# Altium PCB QY-PLC-20200726.PcbDoc (part 4 of 5)
Units mm, origin at the board's own origin, x right, y up, seen from the top; angles counter-clockwise.
Board outline 190.88 x 117.47 mm, 2 copper layers (Top Layer, Bottom Layer); 405 components, 307 nets, 1341 pads, 251 vias.
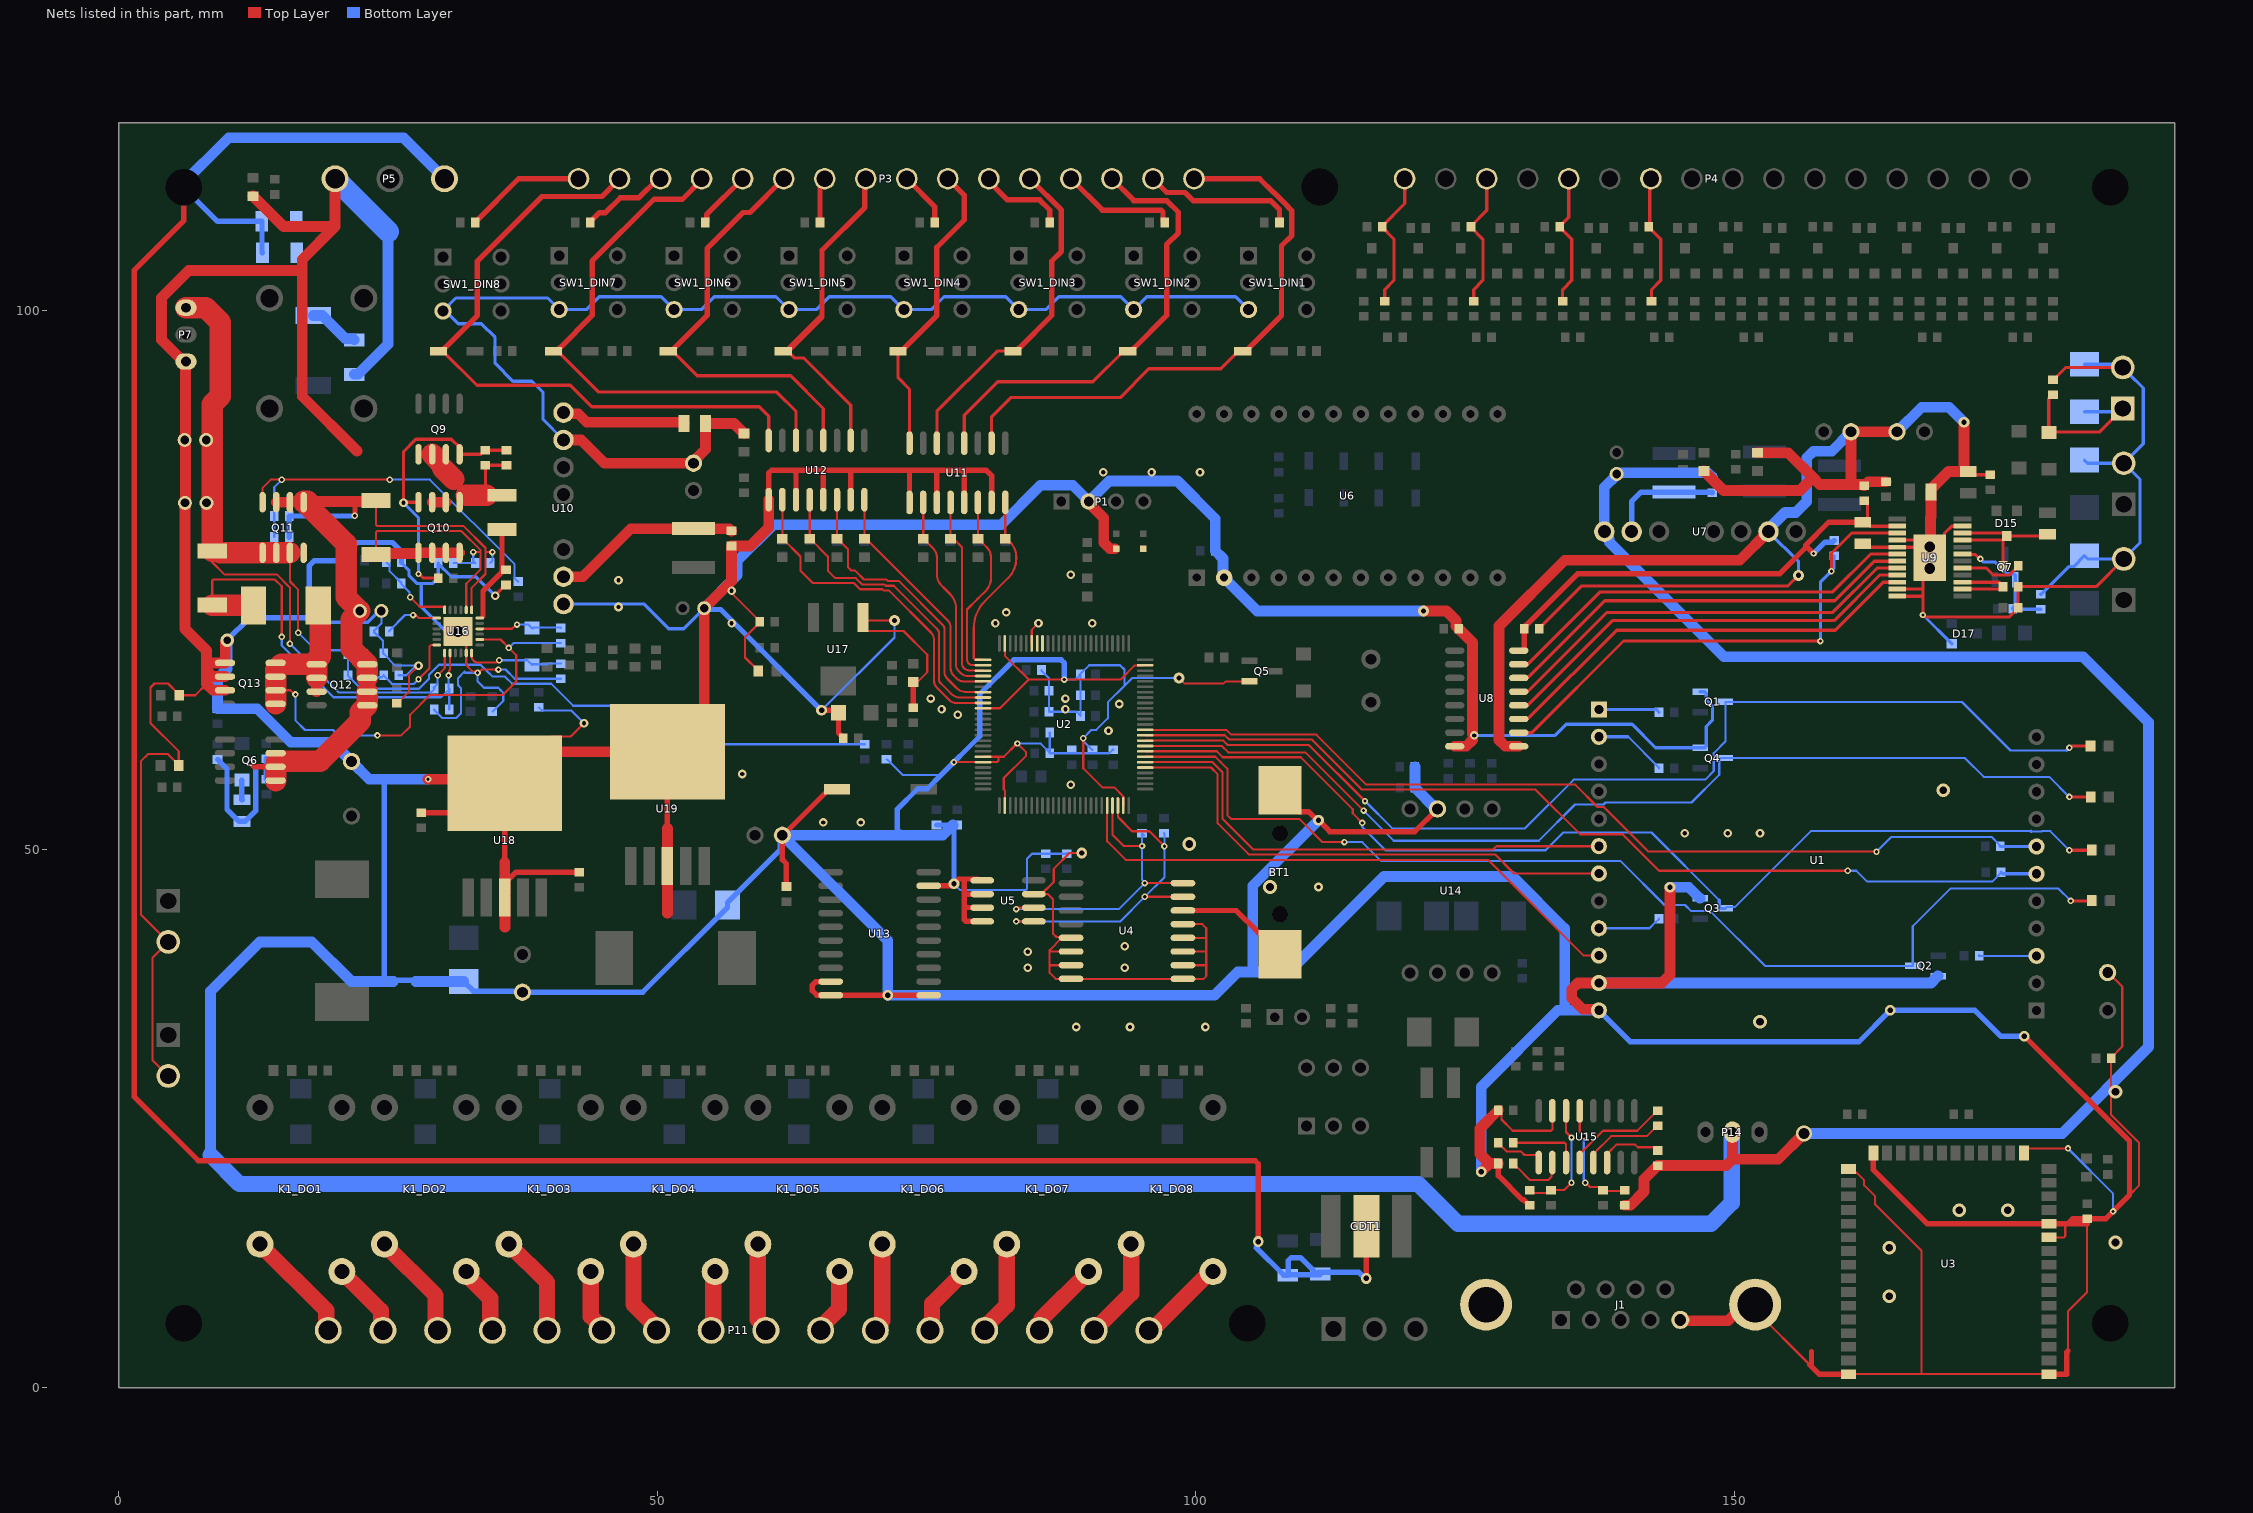
[diagram p3: the nets of this part, all layers, seen from the top]

## Via types
v1: diameter 0.6, hole 0.3, Top Layer to Bottom Layer, 163 vias
v2: diameter 0.8, hole 0.4, Top Layer to Bottom Layer, 40 vias
v3: diameter 1, hole 0.5, Top Layer to Bottom Layer, 30 vias
v4: diameter 1.27, hole 0.711, Top Layer to Bottom Layer, 11 vias
v5: diameter 1.5, hole 1, Top Layer to Bottom Layer, 4 vias
v6: diameter 2, hole 1.5, Top Layer to Bottom Layer, 2 vias
v7: diameter 2, hole 1, Top Layer to Bottom Layer, 1 vias

## Nets (pads, with @x,y where several pads share a name; then routed paths per layer and width w, separated by ;. In a path a pad name is that pad's centre, name@x,y a point inside that pad or via, vN(x,y) a via of type N, cw(c..) or ccw(c..) an arc to the next point about the centre after c; other vN are vias at no path point) (continued)
CH_L_C5: P4.10 R25_A5.2 R26_A5.1 | length 12.2
  Top Layer w0.3: R26_A5.1@142.051,107.873 R26_A5.1@142.051,107.823 142.051,107.773 143.157,106.667 143.157,102.833 142.302,101.978 R25_A5.2@142.302,100.903 ; R26_A5.1@142.145,107.918 142.145,112.173 P4.10@142.24,112.268
CH_L_C6: P4.12 R25_A6.2 R26_A6.1 | length 12.5
  Top Layer w0.3: R25_A6.2@134.047,100.903 134.047,101.978 134.902,102.833 134.902,106.667 133.796,107.773 R26_A6.1@133.796,107.823 133.796,107.873 134.62,108.697 P4.12@134.62,112.268
CH_L_C7: P4.14 R25_A7.2 R26_A7.1 | length 12.8
  Top Layer w0.3: R25_A7.2@125.792,100.903 125.792,101.978 126.647,102.833 126.647,106.667 125.541,107.773 R26_A7.1@125.541,107.823 125.541,107.873 127,109.332 P4.14@127,112.268
CH_L_C8: P4.16 R25_A8.2 R26_A8.1 | length 13
  Top Layer w0.3: R25_A8.2@117.537,100.903 117.537,101.978 118.392,102.833 118.392,106.667 117.286,107.773 R26_A8.1@117.286,107.823 117.286,107.873 119.38,109.967 P4.16@119.38,112.268
D1_IN: LED7.1 U2.1 U11.16 | length 17.2
  Top Layer w0.2: 79.375,70.558 79.375,67.737 79.508,67.605 80.222,67.605 U2.1@80.232,67.595 ; 79.375,70.559 cw(c82.875,70.559) 80.401,73.035 82.586,75.22 ccw(c80.838,76.971) 83.312,76.971 83.312,77.185 ccw(c81.47,77.185) 82.773,78.487 82.687,78.487 82.637,78.487 LED7.1@82.296,78.828 U11.16@82.296,82.213
D2_IN: LED9.1 U2.2 U11.14 | length 17.7
  Top Layer w0.2: LED9.1@79.756,78.828 U11.14@79.756,82.213 ; LED9.1@79.806,78.828 80.583,78.051 80.585,78.05 cw(c79.675,77.139) 80.961,77.139 80.961,75.134 cw(c79.395,75.134) 80.502,74.025 79.84,73.363 79.698,73.221 78.74,72.263 78.74,70.91 78.74,67.564 78.849,67.301 78.882,67.267 ccw(c79.316,67.762) 79.316,67.105 79.318,67.105 80.222,67.105 U2.2@80.232,67.095
D3_IN: LED11.1 U2.3 U11.12 | length 17.9
  Top Layer w0.2: U11.12@77.216,82.213 LED11.1@77.216,78.828 77.509,78.828 78.286,78.051 78.286,71.098 78.286,70.519 78.286,67.4 78.286,67.398 78.286,67.234 78.286,67.232 ccw(c78.842,67.232) 78.45,66.838 78.478,66.81 78.479,66.809 ccw(c78.945,67.275) 78.945,66.616 78.946,66.616 79.526,66.616 79.537,66.605 80.222,66.605 U2.3@80.232,66.595
D4_IN: LED13.1 U2.4 U11.10 | length 19.2
  Top Layer w0.2: U11.10@74.676,82.213 LED13.1@74.676,78.828 74.726,78.828 75.076,78.478 75.076,78.467 75.582,77.961 75.584,77.959 cw(c74.709,77.085) 75.946,77.085 75.946,77.083 75.946,75.872 75.946,75.493 75.946,75.492 ccw(c77.302,75.492) 76.343,74.533 76.344,74.532 76.612,74.264 76.613,74.263 77.162,73.714 77.164,73.712 cw(c75.81,72.359) 77.724,72.359 77.724,67.11 77.724,67.109 ccw(c78.464,67.109) 77.941,66.585 77.942,66.584 78.141,66.385 78.142,66.384 ccw(c78.839,67.081) 78.839,66.095 78.841,66.095 U2.4@80.232,66.095
D5_IN: LED8.1 U2.5 U12.16 | length 22.7
  Top Layer w0.2: U12.16@69.215,82.467 LED8.1@69.215,78.828 69.565,78.478 69.731,78.478 76.955,71.254 76.957,71.252 cw(c76.33,70.626) 77.216,70.626 77.216,66.856 77.216,66.855 ccw(c78.263,66.855) 77.523,66.114 77.524,66.113 77.76,65.877 77.761,65.876 ccw(c78.439,66.554) 78.439,65.595 78.441,65.595 U2.5@80.232,65.595
D6_IN: LED10.1 U2.7 U12.14 | length 26.6
  Top Layer w0.2: U12.14@66.675,82.467 LED10.1@66.675,78.828 66.725,78.828 67.691,77.862 67.691,76.2 68.01,75.881 68.355,75.881 69.179,75.057 71.247,75.057 71.374,74.93 72.39,74.93 76.488,70.832 76.49,70.83 cw(c76.093,70.434) 76.654,70.434 76.654,66.478 76.654,66.477 ccw(c77.579,66.477) 76.925,65.823 76.926,65.822 77.76,64.988 77.761,64.987 ccw(c78.707,65.933) 78.707,64.595 78.709,64.595 U2.7@80.232,64.595
D7_IN: LED12.1 U2.8 U12.12 | length 29.3
  Top Layer w0.2: U12.12@64.135,82.467 LED12.1@64.135,78.828 64.185,78.828 65.821,77.192 65.821,75.875 66.512,75.184 68.41,75.184 68.991,74.603 71.059,74.603 71.186,74.476 71.955,74.476 75.945,70.486 75.946,70.485 cw(c75.463,70.002) 76.146,70.002 76.146,65.791 76.146,65.789 ccw(c76.671,65.789) 76.301,65.417 77.265,64.453 77.266,64.452 ccw(c78.127,65.313) 78.127,64.095 78.129,64.095 U2.8@80.232,64.095
D8_IN: LED14.1 U2.9 U12.10 | length 31.9
  Top Layer w0.2: U12.10@61.595,82.467 LED14.1@61.595,78.828 61.645,78.828 63.281,77.192 63.281,75.875 64.426,74.73 68.222,74.73 68.803,74.149 70.871,74.149 70.998,74.022 71.513,74.022 75.353,70.182 75.355,70.18 cw(c74.539,69.366) 75.692,69.366 75.692,65.635 75.692,65.634 ccw(c76.551,65.634) 75.944,65.026 75.945,65.025 76.835,64.135 77.155,63.815 77.156,63.814 ccw(c77.684,64.341) 77.684,63.595 77.685,63.595 78.647,63.595 78.648,63.595 U2.9@80.232,63.595
DAC_4.5V: C32.2 C38.1 C39.1 R13.1 U8.16 U9.2 | length 47.2
  Top Layer w0.3: C38.1@161.925,80.375 162.19,80.375 162.352,80.537 162.352,82.108 162.102,82.358 C39.1@162.052,82.358 ; C38.1@162.2,80.375 162.565,80.01 U9.2@165.125,80.01
  Top Layer w0.5: U8.16@129.972,68.453 130.445,68.453 130.491,68.499 C32.2@130.491,70.485 130.641,70.635 130.641,70.798 135.43,75.586 154.199,75.586 156.718,78.105 ; v1(157.353,77.47) 156.603,78.22 158.758,80.375 C38.1@161.925,80.375
  Bottom Layer w0.5: v1(157.353,77.47) 158.411,78.528 159.108,78.528 R13.1@159.258,78.678
DAC_CLEAR: U8.15 U9.6 | length 39.4
  Top Layer w0.3: U8.15@129.972,67.183 130.029,67.24 130.867,67.24 137.534,73.907 159.124,73.907 162.636,77.419 U9.6@165.125,77.419
DAC_FAULT: R13.2 U8.10 U9.3 | length 48.6
  Top Layer w0.3: U8.10@129.972,60.833 131.191,60.833 139.7,69.342 v1(157.988,69.342) ; v1(159.004,75.819) 159.004,77.47 160.909,79.375 U9.3@165.125,79.375
  Bottom Layer w0.3: v1(157.988,69.342) 157.988,74.803 v1(159.004,75.819) 159.004,75.9 159.258,76.154 R13.2@159.258,77.278
DAC_LATCH: U8.14 U9.7 | length 39.6
  Top Layer w0.3: U8.14@129.972,65.913 130.029,65.97 130.867,65.97 137.978,73.081 159.314,73.081 162.992,76.759 U9.7@165.125,76.759
DAC_SCLK: U8.13 U9.8 | length 39.9
  Top Layer w0.3: U8.13@129.972,64.643 130.029,64.7 130.867,64.7 138.169,72.002 159.124,72.002 163.246,76.124 U9.8@165.125,76.124
DAC_SDIN: U8.12 U9.9 | length 40.2
  Top Layer w0.3: U8.12@129.972,63.373 130.029,63.43 130.867,63.43 138.677,71.24 159.251,71.24 163.474,75.463 U9.9@165.125,75.463
DAC_SDO: U8.11 U9.10 | length 40.4
  Top Layer w0.3: U8.11@129.972,62.103 130.029,62.16 130.867,62.16 139.058,70.351 159.378,70.351 163.824,74.797 165.119,74.797 U9.10@165.125,74.803
DI_N1: D20_DIN1.1 P3.1 U11.2 | length 53.1
  Top Layer w0.3: U11.2@81.026,87.713 81.026,90.17 82.804,91.948 92.964,91.948 95.631,94.615 102.294,94.615 103.945,96.266 D20_DIN1.1@104.345,96.266
  Top Layer w0.5: P3.1@99.822,112.268 105.918,112.268 107.196,110.99 107.246,110.99 108.515,109.721 108.515,109.671 108.902,109.284 108.902,106.998 107.95,106.045 107.95,99.568 D20_DIN1.1@104.895,96.513
DI_N2: D20_DIN2.1 P3.3 U11.4 | length 42.1
  Top Layer w0.3: U11.4@78.486,87.713 78.486,90.297 81.597,93.408 90.419,93.408 93.277,96.266 D20_DIN2.1@93.677,96.266
  Top Layer w0.5: P3.3@92.202,112.268 94.234,110.236 97.282,110.236 98.361,109.156 98.361,107.229 97.282,106.149 97.282,99.568 D20_DIN2.1@94.227,96.513
DI_N3: D20_DIN3.1 P3.5 U11.6 | length 30.9
  Top Layer w0.3: U11.6@75.946,87.713 75.946,90.678 81.534,96.266 D20_DIN3.1@83.009,96.266
  Top Layer w0.5: D20_DIN3.1@83.559,96.513 86.614,99.568 86.614,104.625 87.503,105.514 87.503,109.347 P3.5@84.582,112.268
DI_N4: D20_DIN4.1 P3.7 U11.8 | length 27.7
  Top Layer w0.3: D20_DIN4.1@72.341,96.266 72.341,93.775 73.406,92.71 U11.8@73.406,87.713
  Top Layer w0.5: D20_DIN4.1@72.891,96.513 75.946,99.568 75.946,105.907 78.497,108.458 78.497,110.733 P3.7@76.962,112.268
DI_N5: D20_DIN5.1 P3.9 U12.2 | length 34.7
  Top Layer w0.3: D20_DIN5.1@62.199,96.14 62.708,95.631 63.558,95.631 67.945,91.244 U12.2@67.945,87.967
  Top Layer w0.5: D20_DIN5.1@61.673,96.266 61.823,96.416 62.253,96.416 65.278,99.441 ; D20_DIN5.1@62.223,96.513 65.278,99.568 65.278,105.629 69.25,109.601 69.25,112.176 P3.9@69.342,112.268
DI_N6: D20_DIN6.1 P3.11 U12.4 | length 39.9
  Top Layer w0.3: D20_DIN6.1@51.005,96.266 51.405,96.266 53.691,93.98 62.357,93.98 65.405,90.932 U12.4@65.405,87.967
  Top Layer w0.5: D20_DIN6.1@51.555,96.513 54.61,99.568 54.61,105.791 57.947,109.128 58.582,109.128 P3.11@61.722,112.268
DI_N7: D20_DIN7.1 P3.13 U12.6 | length 50.3
  Top Layer w0.3: D20_DIN7.1@40.337,96.266 40.737,96.266 44.547,92.456 61.087,92.456 62.865,90.678 U12.6@62.865,87.967
  Top Layer w0.5: D20_DIN7.1@40.887,96.513 43.942,99.568 43.942,104.625 49.68,110.363 52.324,110.363 54.102,112.141 P3.13@54.102,112.268
DI_N8: D20_DIN8.1 P3.15 U12.8 | length 61.5
  Top Layer w0.3: D20_DIN8.1@29.669,96.266 30.069,96.266 33.244,93.091 41.91,93.091 43.914,91.087 59.436,91.087 60.325,90.198 U12.8@60.325,87.967
  Top Layer w0.5: D20_DIN8.1@30.069,96.266 30.219,96.416 30.219,96.513 33.274,99.568 33.274,104.625 39.266,110.617 44.831,110.617 P3.15@46.482,112.268
DI_P1: P3.2 R51_DIN1.2 | length 14.2
  Top Layer w0.5: P3.2@96.012,112.268 97.29,110.99 98.973,110.99 99.727,110.236 106.934,110.236 107.761,109.409 R51_DIN1.2@107.761,108.204 R51_DIN1.2@107.761,108.254
DI_P2: P3.4 R51_DIN2.2 | length 10.7
  Top Layer w0.5: P3.4@88.392,112.268 91.313,109.347 96.774,109.347 96.943,109.178 R51_DIN2.2@96.943,108.354 ; R51_DIN2.2@97.093,108.204 R51_DIN2.2@97.093,108.254
DI_P3: P3.6 R51_DIN3.2 | length 8.2
  Top Layer w0.5: P3.6@80.772,112.268 80.772,112.014 82.486,110.299 85.484,110.299 86.425,109.359 R51_DIN3.2@86.425,108.204 R51_DIN3.2@86.425,108.254
DI_P4: P3.8 R51_DIN4.2 | length 5.2
  Top Layer w0.5: P3.8@73.152,112.268 75.757,109.663 R51_DIN4.2@75.757,108.204 R51_DIN4.2@75.757,108.254
DI_P5: P3.10 R51_DIN5.2 | length 4.3
  Top Layer w0.5: R51_DIN5.2@65.089,108.254 R51_DIN5.2@65.089,108.204 65.089,111.419 65.565,111.895 P3.10@65.565,112.235
DI_P6: P3.12 R51_DIN6.2 | length 5.6
  Top Layer w0.5: R51_DIN6.2@54.421,108.254 R51_DIN6.2@54.421,108.204 54.571,108.354 54.571,108.927 P3.12@57.912,112.268
DI_P7: P3.14 R51_DIN7.2 | length 8.3
  Top Layer w0.5: R51_DIN7.2@43.753,108.204 43.753,108.254 44.623,109.124 45.181,109.124 46.547,110.49 48.26,110.49 50.038,112.268 P3.14@50.292,112.268
DI_P8: P3.16 R51_DIN8.2 | length 11.3
  Top Layer w0.5: R51_DIN8.2@33.085,108.204 33.085,108.254 37.099,112.268 P3.16@42.672,112.268
DO_N1: K1_DO1.3 P11.2 | length 7
  Top Layer w1.5: K1_DO1.3@20.691,10.795 24.32,7.166 24.32,5.525 P11.2@24.511,5.334
DO_N2: K1_DO2.3 P11.4 | length 6.2
  Top Layer w1.5: K1_DO2.3@32.248,10.524 34.48,8.293 34.48,5.525 P11.4@34.671,5.334
DO_N3: K1_DO3.3 P11.6 | length 5.9
  Top Layer w1.5: K1_DO3.3@43.805,10.795 43.805,6.631 44.831,5.605 P11.6@44.831,5.334
DO_N4: K1_DO4.3 P11.8 | length 5.4
  Top Layer w1.5: P11.8@54.991,5.334 55.176,5.519 K1_DO4.3@55.176,10.61
DO_N5: K1_DO5.3 P11.10 | length 6.1
  Top Layer w1.5: P11.10@65.151,5.334 65.151,5.605 66.841,7.295 K1_DO5.3@66.841,10.718
DO_N6: K1_DO6.3 P11.12 | length 6.8
  Top Layer w1.5: P11.12@75.311,5.334 75.502,5.525 75.502,7.821 K1_DO6.3@78.476,10.795
DO_N7: K1_DO7.3 P11.14 | length 7.4
  Top Layer w1.5: P11.14@85.471,5.334 85.662,5.525 85.662,6.424 K1_DO7.3@90.033,10.795
DO_N8: K1_DO8.3 P11.16 | length 8
  Top Layer w1.5: P11.16@95.631,5.334 95.88,5.334 K1_DO8.3@101.341,10.795
DO_P1: K1_DO1.4 P11.1 | length 10.6
  Top Layer w1.5: K1_DO1.4@13.091,13.335 19.24,7.186 19.24,5.525 P11.1@19.431,5.334
DO_P2: K1_DO2.4 P11.3 | length 10
  Top Layer w1.5: K1_DO2.4@24.648,13.335 29.4,8.583 29.4,5.525 P11.3@29.591,5.334
DO_P3: K1_DO3.4 P11.5 | length 9.5
  Top Layer w1.5: K1_DO3.4@36.205,13.335 39.751,9.789 P11.5@39.751,5.334
DO_P4: K1_DO4.4 P11.7 | length 8.9
  Top Layer w1.5: K1_DO4.4@47.762,13.335 47.762,7.753 49.911,5.605 P11.7@49.911,5.334
DO_P5: K1_DO5.4 P11.9 | length 8.3
  Top Layer w1.5: K1_DO5.4@59.319,13.335 59.319,6.356 60.071,5.605 P11.9@60.071,5.334
DO_P6: K1_DO6.4 P11.11 | length 8.3
  Top Layer w1.5: P11.11@70.231,5.334 70.231,5.605 70.876,6.25 K1_DO6.4@70.876,13.335
DO_P7: K1_DO7.4 P11.13 | length 8.8
  Top Layer w1.5: P11.13@80.391,5.334 80.391,5.605 82.433,7.647 K1_DO7.4@82.433,13.335
DO_P8: K1_DO8.4 P11.15 | length 9.4
  Top Layer w1.5: P11.15@90.551,5.334 93.99,8.773 K1_DO8.4@93.99,13.335
EARTH_GND: C45.1 C52.1 GDT1.2 P5.1 pad.2 R12.2 R59.2 | length 261.9
  Top Layer w0.5: pad.2@6,111.475 6,108.362 1.428,103.79 1.428,27.02 7.366,21.082 105.498,21.082 105.791,20.789 v3(105.791,13.58) ; v3(115.824,10.16) GDT1.2@115.824,14.986
  Bottom Layer w0.5: pad.2@6,111.475 9.157,108.318 C45.1@13.259,108.318 13.285,108.293 13.285,105.435 R12.2@13.31,105.41 ; v3(105.791,13.58) 105.695,13.485 105.695,13.07 105.617,12.992 108.159,10.45 R59.2@108.509,10.45 R59.2@108.56,10.501 ; C52.1@110.951,10.738 110.951,10.833 109.691,12.093 108.853,12.093 108.56,11.8 R59.2@108.56,10.501 ; v3(115.824,10.16) 115.689,10.16 115.111,10.738 111.396,10.738 C52.1@111.557,10.577 111.494,10.514 108.573,10.514 R59.2@108.56,10.501
  Bottom Layer w1: pad.2@5.672,111.565 10.185,116.078 26.416,116.078 P5.1@30.226,112.268
EXT_DAC_VCC: C33.1 D11.1 D12.2 P6.1 | length 15.1
  Top Layer w0.3: C33.1@179.578,92.202 179.528,92.202 179.197,91.871 179.197,88.745 183.868,88.745 P6.1@186.055,90.932
  Bottom Layer w0.3: D12.2@182.499,90.637 185.76,90.637 P6.1@186.055,90.932
GND: BT1.2 C1.2 C2.1 C3.1 C4.1 C6.2 C7.2 C8.1 C9.1 C10.1 C11.1 C12.1 C13.1 C14.1 C15.1 C16.1 C17.1 C18.1 C19.1 C20.1 C24.2 C26.2 C27.1 C31.1 C43.2 C44.1 C45.2 C48.1 C49.2 C50.2 C53.1 C55.1 C57.2 C58.2 C59.1 C60.2 C64.1 C65.2 C67.2 C69.2 C70.2 C71.2 C73.2 C74.1 C76.2 C77.2 C78.1 C79.2 C80.1 C81.2 C82.2 C83.2 C84.2 C85.2 D1.1 D2.1 D27.1 D28.1 J1.5 J1.10 J1.11 LED22.1 LED23.1 LED24.1 LED25.1 LED26.1 P1.2 P5.3 P7.3 P12.2 P13.2 P14.2 Q1.E Q2.E Q3.E Q4.E Q5.E Q13.1 Q13.2 Q13.3 R12.1 R74.2 R75.2 R76.2 R84.1 R85.1 R87.2 R92.2 S1.1 U1.11 U1.12 U2.10 U2.19 U2.20 U2.27 U2.49 U2.74 U2.94 U2.99 U3.1 U3.11 U3.12 U3.17 U3.28 U3.29 U3.44 U4.5 U4.6 U4.7 U4.8 U4.9 U4.10 U4.11 U4.12 U4.13 U5.1 U5.2 U5.3 U5.4 U5.7 U6.2 U7.1 U8.8 U10.1 U11.9 U11.11 U11.13 U11.15 U12.9 U12.11 U12.13 U12.15 U13.9 U13.10 U13.11 U13.19 U14.2 U15.15 U16.17 U16.25 U17.1 U18.3 U18.6 U19.3 U19.6 | length 1755.5
  Top Layer w0.2: P13.2@4.572,28.956 3.118,30.41 3.118,39.948 P12.2@4.572,41.402 2.032,43.942 2.032,58.166 2.711,58.845 4.539,58.845 LED24.1@5.549,57.835 ; LED24.1@5.549,57.785 LED24.1@5.549,57.835 ; 8.128,65.356 7.086,64.313 LED26.1@5.588,64.313 5.588,64.363 4.546,65.405 3.302,65.405 2.921,65.024 2.921,61.722 5.549,59.094 LED24.1@5.549,57.835 ; R76.2@25.781,63.554 25.831,63.554 26.915,64.637 26.915,66.158 v2(27.813,67.056) ; v5(31.483,70.231) 32.246,69.468 U16.17@32.246,68.231 ; U16.17@32.246,67.931 32.252,67.925 32.252,67.115 32.864,66.502 33.193,66.502 33.22,66.475 33.482,66.475 33.701,66.694 35.13,66.694 35.179,66.645 v1(35.228,66.694) ; U18.6@38.735,59.055 40.159,60.479 41.937,60.479 v2(43.18,61.722) ; 56.38,74.43 56.38,74.288 59.498,71.17 C78.1@59.498,71.12 59.498,71.07 58.128,69.7 58.128,67.818 59.348,66.598 LED22.1@59.348,66.548 ; v3(72.009,71.247) 69.369,71.247 U17.1@69.088,71.528 69.088,70.678 69.488,70.278 72.851,70.278 75.057,68.072 75.057,66.456 LED23.1@73.752,65.151 ; v1(77.527,58.095) U2.20@80.232,58.095 81.544,58.095 81.661,58.212 81.661,58.595 ; U2.19@80.232,58.595 81.661,58.595 ; U2.10@80.232,63.095 81.802,63.095 84.474,65.767 ; U2.27@82.257,54.07 82.257,55.463 82.161,55.558 82.161,56.627 84.237,58.703 84.237,59.002 v1@83.43,59.809 ; U2.99@82.257,69.12 82.257,67.984 84.474,65.767 ; v1(83.43,59.826) 83.382,59.826 82.15,58.595 81.661,58.595 ; U2.94@84.757,69.12 84.757,70.376 v2(85.381,71) ; U5.7@84.95,45.847 U5.7@85.667,45.847 ; U4.5@87.556,41.783 86.413,40.64 ; U4.5@88.328,41.86 87.045,41.86 86.741,42.164 86.741,45.339 86.233,45.847 U5.7@85.667,45.847 ; U4.7@88.405,39.243 86.54,39.243 86.413,39.116 ; U4.6@88.405,40.513 86.54,40.513 86.413,40.64 ; v3(89.408,49.657) 88.265,49.657 86.792,48.184 86.792,46.971 U5.7@85.667,45.847 ; v1(89.535,60.325) 89.535,57.531 91.313,55.753 92.401,55.753 93.247,54.907 93.247,54.08 U2.49@93.257,54.07 ; U2.74@95.282,67.095 95.272,67.085 94.334,67.085 93.016,65.767 v1(87.776,65.767) 84.474,65.767 ; v3(98.425,65.913) 98.952,65.386 102.543,65.386 102.755,65.598 Q5.E@104.976,65.598 ; U4.10@98.793,39.243 100.965,39.243 ; U4.11@98.793,40.513 100.965,40.513 ; U4.12@98.793,41.783 100.965,41.783 ; U4.13@98.793,43.053 100.584,43.053 100.965,42.672 100.965,41.783 ; BT1.2@107.796,55.499 107.796,55.249 BT1.2@109.546,53.499 ; C53.1@128.078,25.781 128.378,25.481 128.378,24.911 129.413,23.876 132.979,23.876 133.096,23.993 U15.15@133.096,25.718 ; J1.11@151.929,7.724 151.929,7.202 156.972,2.159 ; U3.44@160.577,1.27 167.386,1.27 ; U3.29@160.577,20.32 160.927,19.97 161.354,19.97 162.048,19.275 162.048,18.8 163.064,17.784 163.064,17.022 167.386,12.7 167.386,1.27 ; U3.17@176.887,21.79 176.887,21.875 177.237,22.225 v1(180.975,22.225) ; U3.1@179.197,1.27 167.386,1.27 ; U3.11@179.197,13.97 180.604,13.97 180.721,14.087 180.721,15.24 ; 180.975,3.429 180.975,7.112 182.753,8.89 182.753,15.24 ; C1.2@184.658,38.552 184.724,38.552 186.012,37.264 186.012,31.692 184.977,30.657 C2.1@184.977,30.607 184.977,25.335 187.579,22.733 187.579,18.796 186.682,17.899 ; 86.413,39.116 86.413,40.64 ; 86.413,39.116 86.413,38.534 86.973,37.973 U4.8@88.405,37.973 U4.9@98.793,37.973 100.711,37.973 100.965,38.227 100.965,39.243 ; 100.965,39.243 100.965,40.513 ; 100.965,40.513 100.965,41.783
  Top Layer w0.3: v2(34.925,73.533) 34.925,73.583 35.891,74.549 C65.2@35.941,74.549 ; v2@125.73,60.706 v2(125.857,60.579)
  Top Layer w0.5: C82.2@28.067,53.405 33.085,53.405 U18.6@35.814,56.134 35.814,48.768 ; U18.3@35.814,45.534 36.099,45.819 36.099,47.114 36.866,47.882 C83.2@42.729,47.882 ; 50.927,51.943 U19.6@50.927,58.42 ; U12.9@60.325,82.467 60.325,84.924 60.618,85.217 62.611,85.217 ; C48.1@61.976,46.547 61.976,48.663 61.595,49.044 C85.2@61.595,51.308 61.67,51.308 65.943,55.581 S1.1@66.668,55.581 ; U12.11@62.865,82.467 62.865,84.963 62.611,85.217 ; v3(65.239,62.904) 66.593,62.904 C79.2@66.816,62.682 66.816,60.804 67.245,60.375 C80.1@67.245,60.325 ; U12.13@65.405,82.467 65.405,85.09 65.532,85.217 ; U13.9@66.084,37.719 66.065,37.7 64.682,37.7 64.389,37.407 64.389,36.869 64.79,36.468 66.065,36.468 U13.10@66.084,36.449 v3(71.374,36.449) U13.11@75.184,36.449 ; U12.15@67.945,82.467 67.945,85.154 67.881,85.217 ; U11.9@73.406,82.213 73.406,85.217 ; LED23.1@73.752,65.151 73.752,63.148 C4.1@73.754,63.145 ; U13.19@75.184,46.609 77.343,46.609 v3(77.533,46.799) 77.978,47.244 78.486,47.244 ; U11.11@75.946,82.213 75.946,85.217 ; U11.13@78.486,82.213 78.486,85.09 78.613,85.217 ; U5.1@79.756,47.244 78.486,47.244 ; U5.4@80.15,43.307 80.131,43.326 78.633,43.326 78.486,43.473 78.486,44.831 ; U5.3@80.15,44.577 80.131,44.596 78.721,44.596 78.486,44.831 ; U5.2@80.15,45.847 78.486,45.847 ; U11.15@81.026,82.213 81.026,84.709 80.518,85.217 78.613,85.217 ; BT1.2@109.546,53.499 110.45,53.499 111.244,52.705 v3(111.379,52.705) 112.437,51.647 120.318,51.647 U14.2@122.428,53.757 ; C55.1@128.078,20.828 128.078,19.701 130.33,17.449 130.443,17.449 130.939,16.953 C57.2@130.989,16.953 ; 156.972,2.159 157.162,1.968 ; 157.162,3.365 157.162,1.968 ; U3.44@160.577,1.27 157.861,1.27 157.162,1.968 ; U3.28@162.907,21.79 162.907,20.227 167.894,15.24 U3.12@179.197,15.24 180.721,15.24 180.953,15.24 ; v3(176.911,32.639) 176.961,32.639 186.682,22.918 186.682,17.899 v1(185.166,16.383) 184.466,15.683 C3.1@182.753,15.683 181.397,15.683 180.953,15.24 ; U3.1@179.197,1.27 180.858,1.27 180.858,3.312 180.975,3.429 ; 182.753,15.24 180.953,15.24 ; 62.611,85.217 65.532,85.217 ; 65.532,85.217 67.881,85.217 ; 67.881,85.217 73.406,85.217 ; 73.406,85.217 75.946,85.217 ; 75.946,85.217 78.613,85.217 ; 78.486,44.831 78.486,45.847 ; 78.486,45.847 78.486,47.244
  Top Layer w1: Q13.3@9.842,64.77 8.714,64.77 8.128,65.356 8.128,66.626 ; Q13.2@9.842,66.04 8.714,66.04 8.128,66.626 ; Q13.1@9.842,67.31 8.128,67.31 ; Q13.1@9.874,67.51 9.874,69.185 10.041,69.352 v4(10.041,69.425) ; LED25.1@12.446,110.656 15.279,107.823 20.066,107.823 ; P5.3@20.066,112.268 20.066,107.823 ; 22.098,86.995 17.018,92.075 17.018,103.759 ; v1(28.702,56.515) 35.433,56.515 U18.6@35.814,56.134 38.735,59.055 U19.6@50.927,59.055 54.34,62.468 C43.2@54.34,72.39 56.38,74.43 56.87,74.92 C44.1@56.87,78.167 58.609,78.167 60.325,79.883 U12.9@60.325,82.467 ; 35.814,48.768 U18.3@35.814,45.534 35.849,45.499 35.849,42.764 ; 50.927,44.069 U19.3@50.927,48.455 50.927,51.943 ; P1.2@90.043,82.296 90.043,82.161 91.44,80.764 91.44,78.499 92.026,77.913 D1.1@92.472,77.913 ; U6.2@102.616,75.224 U6.2@102.616,75.3 ; v3(121.129,72.136) 123.263,72.136 124.152,71.247 124.152,70.731 125.681,69.202 v2@125.681,60.706 ; U8.8@124.028,59.563 125.095,59.563 125.681,60.149 ; v3(126.492,20.066) 127.254,20.828 ; C55.1@128.078,20.828 127.254,20.828 ; C53.1@128.078,25.781 126.365,24.068 126.365,21.717 127.254,20.828 ; U1.12@137.414,35.052 137.318,35.148 135.921,35.148 134.891,36.178 134.891,37.006 135.477,37.592 U1.11@137.414,37.592 143.256,37.592 144.018,38.354 v3(144.018,46.482) ; C58.2@139.827,16.953 140.344,16.953 141.609,18.219 141.609,19.37 C59.1@142.875,20.636 149.234,20.636 149.82,21.222 ; J1.5@145.055,6.223 149.393,6.223 J1.11@150.894,7.724 ; P14.2@149.82,23.749 149.82,21.222 ; v5(156.464,23.622) 154.064,21.222 149.82,21.222 ; 8.128,66.626 8.128,67.31 ; 8.128,67.31 8.128,68.453 6.128,70.453 C70.2@6.128,82.169 6.175,82.216 6.175,95.243 6.02,95.243 3.937,97.326 3.937,101.219 6.477,103.759 17.018,103.759 ; 17.018,103.759 17.018,104.775 20.066,107.823
  Bottom Layer w0.2: C76.2@23.684,70.231 23.684,70.181 24.527,69.338 24.527,68.245 C73.2@24.573,68.199 24.573,68.149 25.666,67.056 v2@27.566,67.056 ; C76.2@23.684,70.281 24.368,70.965 C60.2@24.368,72.136 ; R84.1@25.977,66.167 26.677,66.167 v2@27.566,67.056 ; v2(27.813,67.056) v2@27.566,67.056 ; C74.1@29.272,62.992 29.272,62.942 30.026,62.188 31.327,62.188 31.75,62.611 31.75,64.988 31.477,65.261 31.477,65.894 32.067,66.484 32.154,66.398 v1(33.297,66.398) 33.297,65.6 33.892,65.005 35.216,65.005 35.477,64.744 35.477,64.736 35.687,64.526 35.687,63.766 34.721,62.8 R75.2@34.671,62.8 ; v1(35.228,66.694) 35.893,66.694 36.742,65.845 C71.2@41.021,65.845 ; R74.2@38.989,63.181 39.289,62.881 42.021,62.881 v2(43.18,61.722) ; v3(65.239,62.904) 72.009,69.675 v3(72.009,71.247) ; R85.1@71.266,58.355 71.316,58.355 72.775,56.896 76.321,56.896 ; v3(77.533,46.799) 78.124,46.209 84.192,46.209 84.309,46.326 84.309,49.13 84.774,49.595 C7.2@86.059,49.595 C8.1@88.011,49.595 88.073,49.657 v3(89.408,49.657) ; v1(83.43,59.826) 83.439,59.817 85.586,59.817 C6.2@86.425,58.978 ; C12.1@85.659,66.645 85.659,66.595 86.36,65.894 C14.1@86.36,64.711 C13.1@86.36,62.778 88.928,62.778 C18.1@89.278,62.427 ; C15.1@86.425,60.844 C6.2@86.425,58.978 ; v1(87.776,65.767) 88.8,65.767 88.928,65.895 88.978,65.895 89.128,66.045 89.128,66.145 90.082,67.099 92.957,67.099 93.364,66.692 93.364,65.202 ; C18.1@89.278,62.377 C18.1@89.278,62.427 ; C17.1@89.278,66.195 C20.1@89.278,64.311 C18.1@89.278,62.427 ; C16.1@90.395,59.247 90.345,59.247 89.612,59.981 89.612,60.248 v1(89.535,60.325) 90.301,61.091 90.742,61.091 91.821,62.17 91.821,63.659 93.364,65.202 ; C10.1@92.329,59.247 92.279,59.247 91.96,58.928 C6.2@86.425,58.928 C6.2@86.425,58.978 ; v3(98.425,65.913) 94.075,65.913 93.364,65.202 ; 105.283,46.355 105.283,46.609 ; v1(180.975,22.225) 185.166,18.034 v1(185.166,16.383)
  Bottom Layer w0.3: 17.653,71.628 17.78,71.501 18.199,71.082 23.114,71.082 24.168,72.136 C60.2@24.368,72.136 ; C77.2@26.233,76.656 26.233,76.606 26.924,75.915 26.924,75.458 27.706,74.676 28.067,74.676 ; C67.2@29.653,76.581 C67.2@29.653,76.531 ; v5(31.483,70.231) 30.353,70.231 28.067,72.517 28.067,74.676 ; v2(34.925,73.533) 33.147,75.311 30.873,75.311 C67.2@29.653,76.531 ; U10.1@41.275,72.771 48.768,72.771 51.054,70.485 52.435,70.485 C43.2@54.34,72.39 ; v2(125.857,60.579) 133.35,60.579 134.377,61.606 140.499,61.606 142.674,59.431 Q4.E@146.812,59.431 147.237,59.431 147.387,59.581 147.387,61.408 147.955,61.976 147.955,63.32 147.387,63.888 147.387,64.488 147.237,64.638 Q1.E@146.812,64.638 ; 28.067,74.676 29.083,74.676 29.653,75.246 C67.2@29.653,76.531
  Bottom Layer w0.5: v4(10.041,69.425) 12.117,71.501 17.78,71.501 ; 17.653,71.628 17.653,76.327 18.137,76.811 R87.2@21.398,76.811 21.398,77.786 22.098,78.486 25.4,78.486 26.233,77.653 C77.2@26.233,76.656 ; 24.384,56.515 24.638,56.261 24.638,37.726 ; 25.462,37.846 27.432,37.846 27.552,37.726 ; D27.1@32.004,37.726 32.899,36.831 37.359,36.831 C84.2@37.459,36.731 48.623,36.731 56.508,44.616 D28.1@56.508,44.831 56.508,45.046 61.385,49.923 61.385,51.098 C85.2@61.595,51.308 ; C43.2@54.34,72.39 54.462,72.268 55.875,72.268 v3(65.239,62.904) ; 72.544,51.574 72.251,51.867 72.251,53.709 74.168,55.626 75.051,55.626 76.321,56.896 79.926,60.501 79.926,64.432 83.093,67.599 87.483,67.599 87.776,67.306 v1(87.776,65.767) ; C11.1@75.917,52.259 77.451,52.259 77.651,52.059 77.533,51.942 v3(77.533,46.799) ; U1.12@137.414,35.052 140.335,32.131 161.544,32.131 v3(164.465,35.052) 172.339,35.052 174.752,32.639 v3(176.911,32.639)
  Bottom Layer w1: 8.509,21.59 8.509,36.83 13.081,41.402 17.907,41.402 21.583,37.726 24.638,37.726 25.462,37.726 ; v4(10.041,69.425) 10.041,66.742 9.144,65.845 R92.2@9.144,63.057 12.84,63.057 15.953,59.944 19.812,59.944 C81.2@21.59,58.166 23.241,56.515 24.384,56.515 v1(28.702,56.515) ; C64.1@21.844,94.107 22.194,94.107 24.988,96.901 24.988,107.346 ; 27.552,37.726 D27.1@32.004,37.726 ; C43.2@54.34,72.39 57.415,75.465 57.415,76.788 60.764,80.137 81.915,80.137 85.578,83.8 88.565,83.8 90.043,82.322 P1.2@90.043,82.296 91.948,84.201 98.298,84.201 101.792,80.707 C24.2@101.792,77.724 102.511,77.005 102.511,75.329 U6.2@102.616,75.224 105.704,72.136 v3(121.129,72.136) ; C19.1@77.451,52.259 76.5,51.308 C85.2@61.595,51.308 71.374,41.529 v3(71.374,36.449) 101.727,36.449 103.886,38.608 105.283,38.608 ; 105.283,46.355 105.283,38.608 ; 105.283,46.609 v3(111.379,52.705) ; C50.2@120.334,57.658 C49.2@120.334,55.724 122.301,53.757 U14.2@122.428,53.757 ; v3(126.492,20.066) 126.492,27.94 133.604,35.052 134.239,35.052 ; U1.12@137.414,35.052 134.239,35.052 ; U1.11@137.414,37.592 168.245,37.592 168.885,38.232 Q2.E@168.91,38.232 ; v3(144.018,46.482) 145.766,46.482 146.787,45.461 Q3.E@146.812,45.461 ; C27.1@147.955,84.52 147.512,84.963 139.388,84.963 139.335,84.909 139.122,84.909 C26.2@139.065,84.852 139.065,84.771 137.922,83.628 137.922,79.258 138.372,78.808 138.372,78.544 149.032,67.884 182.361,67.884 188.448,61.797 188.448,31.635 180.435,23.622 v5(156.464,23.622) ; P14.2@149.756,23.685 P14.2@149.82,23.749 ; 105.283,38.608 108.585,38.608 117.463,47.486 129.39,47.486 134.239,42.637 134.239,35.052
  Bottom Layer w1.5: 8.509,21.59 11.176,18.923 120.65,18.923 124.333,15.24 133.652,15.24 133.654,15.238 147.826,15.238 149.756,17.168 149.756,23.435 149.82,23.499 P14.2@149.82,23.685
  Bottom Layer w2: P5.3@20.066,112.268 24.988,107.346
  other v2: 88.881,33.5 93.881,33.5 100.881,33.5 84.381,39 93.381,39 84.381,40.5 93.381,41 111.381,46.5 145.381,51.5 149.381,51.5 152.381,51.5 65.381,52.5 68.881,52.5 88.381,56 57.881,57 91.881,61 77.881,62.5 76.381,63 87.881,63 92.881,63.5 75.381,64 87.881,64 56.881,71 81.381,71 90.381,71 82.381,72 46.381,72.5 56.881,74 46.381,75 88.381,75.5 91.381,85 95.881,85 100.381,85
  other v4: 164.381,8.5 164.381,13 185.381,13.5 170.881,16.5 175.381,16.5 185.381,27.5 152.381,34 106.881,46.5 99.381,50.5 169.381,55.5
I2C1_SCL: U2.92
I2C1_SDA: U2.93
I2C2_SCL: R20.2 U2.47 U4.16 U5.6 | length 29.1
  Top Layer w0.2: v1(83.312,44.45) 83.42,44.45 83.547,44.577 U5.6@84.95,44.577 ; U2.47@92.257,54.07 92.257,51.344 93.29,50.311 v1(94.996,50.311) ; v1(95.25,46.863) U4.16@98.793,46.863
  Bottom Layer w0.2: v1(83.312,44.45) 92.837,44.45 v1(95.25,46.863) 95.25,46.926 94.996,47.18 v1(94.996,50.311) R20.2@94.996,51.497 R20.2@95.193,51.3
I2C2_SDA: R18.2 U2.48 U4.15 U5.5 | length 31.3
  Top Layer w0.2: v1(83.312,43.307) U5.5@84.95,43.307 ; U2.48@92.757,54.07 92.757,52.995 94.07,51.682 95.689,51.682 v1(97.078,50.292) ; v1(95.25,45.593) U4.15@98.793,45.593
  Bottom Layer w0.2: v1(83.312,43.307) 92.964,43.307 v1(95.25,45.593) 97.078,47.421 97.078,51.447 R18.2@97.028,51.497
ISO_DAC_GND: C29.2 C30.1 C32.1 C33.2 C34.2 C35.2 C36.2 C37.2 C38.2 C39.2 C41.2 C42.2 D12.1 D14.1 D16.1 D17.1 LED19.1 LED20.2 P6.2 P8.2 P9.2 R39.2 U7.7 U8.9 U9.4 U9.5 U9.11 U9.12 U9.23 U9.25 | length 244.3
  Top Layer w0.3: C32.1@131.891,70.485 131.891,70.535 135.816,74.461 154.979,74.461 v3(155.956,75.438) ; C38.2@161.925,78.375 162.246,78.054 167.183,78.054 U9.25@167.83,77.406 ; U9.12@165.125,73.508 167.483,73.508 167.509,73.533 ; U9.11@165.125,74.168 167.382,74.168 167.509,74.041 ; U9.4@165.125,78.715 166.798,78.715 U9.25@167.968,77.544 ; v1(167.509,71.759) 167.509,73.533 ; 167.777,71.572 175.537,71.572 176.341,72.376 R39.2@176.341,72.426 C42.2@176.341,74.393 183.587,74.393 P9.2@186.155,76.961 ; U9.25@168.211,78.486 U9.25@168.211,77.787 ; U9.23@171.171,80.01 171.165,80.004 170.178,80.004 169.498,79.324 169.498,79.074 U9.25@168.211,77.787 ; C34.2@171.704,85.074 172.004,84.774 C35.2@173.754,84.774 C35.2@173.804,84.774 ; C33.2@179.578,93.602 179.628,93.602 180.768,94.742 P6.2@186.055,94.742 ; 167.509,73.533 167.509,74.041 ; 167.509,74.041 167.509,76.45 U9.25@168.148,77.089 168.148,77.365 U9.25@167.968,77.544 ; U9.25@167.968,77.544 U9.25@168.211,77.787
  Top Layer w1: U8.9@129.972,59.563 128.729,59.563 128.143,60.149 128.143,70.739 134.239,76.835 150.495,76.835 U7.7@153.162,79.502 ; LED19.1@147.174,85.129 148.991,83.312 156.083,83.312 157.289,84.519 ; LED20.2@152.146,86.829 154.979,86.829 157.289,84.519 ; C39.2@161.877,83.883 161.036,83.883 ; C39.2@162.052,83.758 162.433,84.139 C37.2@164.084,84.139 ; C30.1@165.1,88.773 C29.2@160.833,88.773 160.833,84.086 161.036,83.883 ; U9.25@168.211,78.486 168.211,80.806 168.259,80.853 C36.2@168.259,83.185 168.259,83.46 169.873,85.074 C34.2@171.704,85.074 171.429,85.074 171.429,85.349 171.323,85.455 v3(171.323,89.662) ; 157.289,84.519 157.925,83.883 161.036,83.883
  Bottom Layer w0.3: U7.7@153.162,79.502 155.956,76.708 v3(155.956,75.438) ; v1(167.509,71.759) D17.1@170.18,69.088 ; C41.2@178.435,73.684 178.485,73.684 181.058,76.257 181.499,76.257 D16.1@182.499,77.257 182.795,76.961 P9.2@186.155,76.961 187.659,78.465 187.659,84.348 P8.2@186.155,85.852 ; D14.1@182.499,86.147 182.794,85.852 P8.2@186.155,85.852 ; P6.2@186.055,94.742 182.794,94.742 D12.1@182.499,95.037 186.776,95.037 186.676,94.937 186.676,94.121 187.96,92.837 187.96,87.657 P8.2@186.155,85.852
  Bottom Layer w1: U7.7@153.162,79.502 153.162,79.746 154.686,81.27 155.692,81.27 156.718,82.296 156.718,86.36 157.332,86.974 159.034,86.974 C29.2@160.833,88.773 ; C30.1@165.1,88.773 167.386,91.059 169.926,91.059 v3(171.323,89.662)
  other v5: 168.148,76.073 168.148,78.105
ISO_DI_GND: C46.2 C47.1 LED21.1 SW1_DIN1.3 SW1_DIN2.3 SW1_DIN3.3 SW1_DIN4.3 SW1_DIN5.3 SW1_DIN6.3 SW1_DIN7.3 SW1_DIN8.3 U10.7 | length 121.8
  Top Layer w1: U10.7@41.275,88.011 42.926,88.011 45.085,85.852 C46.2@53.34,85.852 53.34,86.014 54.467,87.141 C47.1@54.467,89.535 57.111,89.535 LED21.1@58.039,88.607
  Bottom Layer w0.3: SW1_DIN8.3@30.082,99.989 SW1_DIN8.3@30.209,100.116 ; U10.7@41.275,88.011 39.37,89.916 39.37,92.456 38.354,93.472 36.576,93.472 34.925,95.123 34.925,97.536 33.655,98.806 31.519,98.806 SW1_DIN8.3@30.209,100.116 ; SW1_DIN1.3@104.885,100.116 103.681,101.32 95.421,101.32 SW1_DIN2.3@94.217,100.116 93.013,101.32 87.276,101.32 86.072,100.116 SW1_DIN3.3@83.549,100.116 82.345,101.32 76.608,101.32 75.404,100.116 SW1_DIN4.3@72.881,100.116 71.677,101.32 65.94,101.32 64.736,100.116 SW1_DIN5.3@62.213,100.116 61.009,101.32 55.272,101.32 54.068,100.116 SW1_DIN6.3@51.545,100.116 50.341,101.32 44.604,101.32 43.4,100.116 SW1_DIN7.3@40.877,100.116 39.8,101.193 31.286,101.193 SW1_DIN8.3@30.209,100.116
LTE_LINKA: R3.1 U1.1 | length 5.7
  Bottom Layer w0.3: U1.1@137.414,62.992 142.749,62.992 142.999,62.742 R3.1@142.999,62.738
LTE_LINKA_MCU: LED1.1 Q1.C U2.60 | length 101.2
  Top Layer w0.2: U2.60@95.282,60.095 102.542,60.095 102.947,59.69 110.49,59.69 v1(115.697,54.483)
  Top Layer w0.3: v1(181.102,59.436) 181.183,59.436 181.346,59.599 LED1.1@183.058,59.599
  Bottom Layer w0.2: v1(115.697,54.483) 118.233,51.947 130.547,51.947 135.076,56.476 147.283,56.476 148.083,57.276 148.083,58.928 149.162,60.007 Q1.C@149.162,63.688 171.135,63.688 175.641,59.182 180.848,59.182
  Bottom Layer w0.3: 180.848,59.182 v1(181.102,59.436)
LTE_LINKB: R11.1 U1.2 | length 6.8
  Bottom Layer w0.2: 140.128,60.452 142.999,57.581 R11.1@142.999,57.531
  Bottom Layer w0.3: U1.2@137.414,60.452 140.128,60.452
LTE_LINKB_MCU: LED4.1 Q4.C U2.59 | length 96.9
  Top Layer w0.2: U2.59@95.282,59.595 102.4,59.595 102.994,59.001 110.163,59.001 v1(115.57,53.594)
  Top Layer w0.3: v1(181.102,54.864) LED4.1@183.085,54.864
  Bottom Layer w0.2: v1(115.57,53.594) 118.364,50.8 131.826,50.8 135.191,54.165 137.839,54.165 138.03,54.356 146.017,54.356 148.587,56.926 148.587,58.331 148.737,58.481 Q4.C@149.162,58.481 171.389,58.481 173.137,56.733 179.233,56.733 v1(181.102,54.864)
LTE_NET: R9.1 U1.15 | length 5.3
  Bottom Layer w0.2: R9.1@172.745,40.107 U1.15@178.054,40.107
  Bottom Layer w0.3: R9.1@172.72,40.132 R9.1@172.745,40.107
LTE_NET_MCU: LED2.1 Q2.C U2.57 | length 104.1
  Top Layer w0.2: U2.57@95.282,58.595 98.304,58.595 101.799,58.595 102.301,58.093 102.308,58.093 102.921,57.48 102.921,53.162 103.251,52.832 109.601,52.832 111.76,50.673 v1(113.792,50.673)
  Top Layer w0.3: v1(181.229,45.212) 183.148,45.212 LED2.1@183.185,45.249
  Bottom Layer w0.2: v1(113.792,50.673) 115.443,50.673 117.21,48.906 139.435,48.906 143.51,44.831 145.415,44.831 145.981,44.265 147.759,44.265 152.842,39.182 Q2.C@166.56,39.182 166.56,42.862 170.053,46.355 180.086,46.355 v1(181.229,45.212)
LTE_PWR_KEY: U1.10 U2.46 | length 53.4
  Top Layer w0.2: U2.46@91.757,54.07 91.757,50.737 93.472,49.022 127.127,49.022 136.017,40.132 U1.10@137.414,40.132
LTE_RELOAD: R2.1 U1.18 U2.61 | length 88.9
  Top Layer w0.2: U2.61@95.282,60.595 102.684,60.595 103.081,60.198 110.744,60.198 115.389,55.553 131.518,55.553 135.675,51.396 139.612,51.396 143.002,48.006 v1(160.528,48.006)
  Bottom Layer w0.2: v1(160.528,48.006) 161.321,48.006 162.321,47.005 173.928,47.005 174.752,47.829 R2.1@174.752,47.879
  Bottom Layer w0.3: R2.1@174.752,47.879 174.904,47.727 U1.18@178.054,47.727
LTE_RST: R4.1 U1.19 U2.62 | length 88.4
  Top Layer w0.2: U2.62@95.282,61.095 102.826,61.095 103.269,60.652 111.172,60.652 115.817,56.007 135.218,56.007 137.289,53.936 137.871,53.936 142.023,49.784 v1(163.195,49.784)
  Bottom Layer w0.2: v1(163.195,49.784) 164.557,51.146 173.883,51.146 174.687,50.342 R4.1@174.687,50.292
  Bottom Layer w0.3: R4.1@174.687,50.292 174.712,50.267 U1.19@178.054,50.267
LTE_RX: U1.7 U2.55 | length 48.9
  Top Layer w0.2: U2.55@95.282,57.595 101.402,57.595 102.013,56.984 102.013,52.419 104.902,49.53 127.762,49.53 129.54,47.752 U1.7@137.414,47.752
LTE_TX: U1.6 U2.56 | length 48.1
  Top Layer w0.2: U2.56@95.282,58.095 101.544,58.095 102.467,57.172 102.467,52.854 105.337,49.984 127.588,49.984 127.896,50.292 U1.6@137.414,50.292
LTE_WORK: R10.1 U1.9 | length 6
  Bottom Layer w0.2: U1.9@137.414,42.672 142.11,42.672 142.699,43.261 142.749,43.261 142.999,43.511 R10.1@142.999,43.561
LTE_WORK_MCU: LED3.1 Q3.C U2.58 | length 99.9
  Top Layer w0.2: U2.58@95.282,59.095 95.292,59.105 95.977,59.105 95.981,59.109 101.927,59.109 102.489,58.547 109.728,58.547 114.554,53.721 114.554,53.34 v1(115.443,52.451)
  Top Layer w0.3: v1(181.102,49.911) 183.149,49.911 LED3.1@183.185,49.947
  Bottom Layer w0.2: v1(115.443,52.451) 115.443,52.07 117.602,49.911 132.461,49.911 134.112,51.562 142.307,51.562 148.587,45.282 ; Q3.C@149.162,44.511 149.307,44.656 150.066,44.656 157.099,51.689 177.54,51.689 ; 177.576,51.653 178.532,51.653 178.568,51.689 179.324,51.689 v1(181.102,49.911)
  Bottom Layer w0.3: 148.587,45.282 148.587,44.661 148.737,44.511 Q3.C@149.162,44.511 ; 177.54,51.689 177.576,51.653
NetBT1_1: BT1.1 U4.14 | length 10.8
  Top Layer w0.5: U4.14@98.793,44.323 103.732,44.323 105.796,42.259 106.046,42.259 107.796,40.509 BT1.1@107.796,40.259
NetC5_1: C5.1 D10.1 | length 1.8
  Bottom Layer w0.5: D10.1@11.407,56.427 11.407,54.617 C5.1@11.43,54.594
NetC5_2: C5.2 C60.1 C63.1 C66.2 Q6.1 Q6.2 Q6.3 Q11.1 Q11.2 Q11.3 Q12.5 Q12.6 Q12.7 Q12.8 R68.1 R90.1 RAC1.2 U16.1 | length 87.1
  Top Layer w0.2: RAC1.2@23.876,82.383 23.876,80.127 23.993,80.01 32.004,80.01 34.036,77.978 34.036,77.597 ; U16.1@32.746,72.531 32.746,74.275 34.036,75.565 34.036,77.597 ; v1(34.671,77.597) 34.036,77.597
  Top Layer w0.5: v1(12.192,58.039) 12.219,58.039 12.6,57.658 Q6.2@14.542,57.658 ; v1(21.901,80.969) 21.92,80.988 21.92,81.876 22.352,82.308
  Top Layer w1: Q11.3@14.605,82.233 Q11.2@15.875,82.233 15.95,82.308 17.145,82.308 17.504,82.308 22.352,82.308
  Top Layer w2: Q6.1@14.542,56.388 Q6.2@14.542,57.658 ; 14.669,58.166 18.669,58.166 22.401,61.898 22.401,62.723 Q12.5@23.051,63.373 Q12.6@23.051,64.643 ; Q11.1@17.145,82.233 Q11.1@17.145,82.308 ; 17.504,82.308 17.504,81.949 21.082,78.371 21.082,73.422 C60.1@22.368,72.136 21.59,71.358 21.59,68.644 Q12.8@23.051,67.183 Q12.7@23.051,65.913
  Bottom Layer w0.2: C63.1@34.482,76.581 34.671,76.77 v1(34.671,77.597)
  Bottom Layer w0.5: R90.1@9.144,58.347 9.194,58.347 9.344,58.197 9.344,58.147 10.033,57.458 10.033,53.716 11.155,52.594 C5.2@11.43,52.594 11.705,52.594 12.709,53.598 12.709,57.522 v1(12.192,58.039) ; C66.2@15.813,78.994 R68.1@15.813,80.956 21.888,80.956 v1(21.901,80.969)
NetC27_2: C27.2 L1.2 U7.2 | length 10.7
  Bottom Layer w0.5: U7.2@140.462,79.502 140.462,82.296 141.329,83.163 L1.2@144.399,83.163 144.42,83.142 147.934,83.142 C27.2@147.955,83.12
NetC28_1: C28.1 R91.1 | length 1.9
  Bottom Layer w0.5: R91.1@13.666,58.423 13.683,58.406 13.683,56.532 C28.1@13.7,56.515
NetC40_1: C40.1 D15.3 FB2.1 U9.21 U9.22 | length 14.8
  Top Layer w0.3: U9.21@171.171,78.715 174.907,78.715 174.957,78.764 D15.3@174.982,78.764 ; U9.22@171.171,79.375 174.982,79.375 175.282,79.075 175.282,79.064 D15.3@174.982,78.764 ; C40.1@174.941,76.327 174.941,78.723 D15.3@174.982,78.764 ; D15.3@175.282,79.089 178.895,79.089 FB2.1@179.07,79.264
NetC40_2: C40.2 U9.17 | length 5.8
  Top Layer w0.3: U9.17@171.171,76.124 173.366,76.124 174.017,75.473 175.537,75.473 176.341,76.277 C40.2@176.341,76.327
NetC41_1: C41.1 Q7.B R37.1 U9.19 | length 11.6
  Top Layer w0.3: U9.19@171.171,77.419 171.202,77.388 172.34,77.388 172.766,76.962 v1(172.847,76.962)
  Bottom Layer w0.3: v1(172.847,76.962) 173.138,76.671 174.235,76.671 175.306,75.6 175.933,75.6 176.083,75.45 Q7.B@176.083,75.025 176.083,72.635 175.833,72.385 R37.1@175.833,72.335 175.884,72.284 C41.1@178.435,72.284
NetC42_1: C42.1 U9.14 U9.15 | length 7.6
  Top Layer w0.3: U9.14@171.171,74.168 174.716,74.168 174.716,74.669 174.581,74.803 U9.15@171.171,74.803
NetC44_2: C44.2 L4.2 U10.2 | length 17.5
  Top Layer w1: U10.2@41.275,75.311 43.053,75.311 47.52,79.778 L4.2@53.34,79.778 56.659,79.778 C44.2@56.87,79.567
NetC47_2: C47.2 U10.8 | length 11.7
  Top Layer w1: U10.8@41.275,90.551 41.372,90.454 42.642,90.454 43.434,89.662 52.467,89.662 C47.2@52.467,89.535
NetC54_1: C54.1 U15.1 | length 4.8
  Top Layer w0.2: C54.1@128.078,22.762 128.078,22.712 128.832,21.958 130.162,21.958 130.502,21.618 131.641,21.618 131.826,21.433 U15.1@131.826,20.918
NetC54_2: C54.2 U15.3 | length 6.6
  Top Layer w0.2: C54.2@129.478,22.762 134.22,22.762 134.366,22.616 U15.3@134.366,20.918
NetC55_2: C55.2 U15.2 | length 5.7
  Top Layer w0.2: C55.2@129.478,20.828 129.478,20.778 129.778,20.478 129.828,20.478 131.002,19.304 132.715,19.304 133.019,19.608 133.019,20.841 U15.2@133.096,20.918
NetC56_1: C56.1 U15.4 | length 9.7
  Top Layer w0.2: U15.4@135.636,20.918 135.636,21.718 137.794,23.876 140.982,23.876 142.825,25.719 C56.1@142.875,25.719
NetC56_2: C56.2 U15.5 | length 7.8
  Top Layer w0.2: U15.5@136.906,20.918 136.906,21.718 138.556,23.368 141.874,23.368 142.825,24.319 C56.2@142.875,24.319
NetC57_1: C57.1 R62.1 U15.14 | length 11.4
  Top Layer w0.2: C57.1@130.989,18.353 131.264,18.078 132.694,18.078 R62.1@132.969,18.353 134.177,18.353 v1(134.874,19.05) v1@134.874,18.942 ; U15.14@134.366,25.718 134.366,23.749 v1(134.874,23.241)
  Bottom Layer w0.2: v1(134.874,19.05) v1(134.874,23.241)
NetC58_1: C58.1 R64.1 U15.13 | length 11
  Top Layer w0.2: U15.13@135.636,25.718 135.636,23.749 v1(136.017,23.368) ; v1(136.144,19.05) 136.198,19.05 136.595,18.653 137.495,18.653 R64.1@137.857,18.291 ; R64.1@137.795,18.353 R64.1@137.857,18.291 ; C58.1@139.827,18.353 139.765,18.291 R64.1@137.857,18.291
  Bottom Layer w0.2: v1(136.017,23.368) 136.017,19.177 v1(136.144,19.05)
NetC59_2: C59.2 U15.6 | length 6.1
  Top Layer w0.2: U15.6@138.176,20.918 138.176,21.718 139.064,22.606 140.753,22.606 141.023,22.336 142.575,22.336 C59.2@142.875,22.036
NetC62_1: C62.1 Q9.4 Q10.4 R67.1 R70.2 | length 26.5
  Top Layer w0.3: v2(26.416,82.169) 26.416,86.926 27.571,88.081 30.869,88.081 31.623,87.327 Q9.4@31.623,86.677 33.588,86.677 33.971,87.06 R67.1@34.021,87.06 C62.1@35.988,87.06 ; v2@26.416,82.233 Q10.4@27.813,82.233 ; v1(27.813,75.565) 27.894,75.565 28.275,75.184 R70.2@29.653,75.184
  Bottom Layer w0.3: v2(26.416,82.169) 27.813,80.772 v1(27.813,75.565)
NetC62_2: C62.2 Q9.1 Q9.2 Q9.3 Q10.1 Q10.2 Q10.3 R65.1 R67.2 | length 10.2
  Top Layer w0.3: 34.163,82.861 34.021,83.003 R67.2@34.021,85.66 C62.2@35.988,85.66
  Top Layer w1: Q10.3@29.083,82.233 Q10.2@30.353,82.233
  Top Layer w2: Q9.2@29.083,86.677 29.654,86.105 ; 30.069,85.383 31.083,84.369 ; 32.251,82.861 34.163,82.861
NetC63_2: C63.2 C67.1 Q10.5 Q10.6 Q10.7 Q10.8 RAC1.1 U16.2 | length 30.2
  Top Layer w0.2: RAC1.1@23.876,77.383 23.876,79.439 23.993,79.556 31.783,79.556 33.582,77.757 33.582,77.597 ; U16.2@32.246,72.531 32.246,74.664 33.582,76 33.582,77.597 ; v1(32.893,77.597) 33.582,77.597
  Top Layer w1: RAC1.1@23.876,77.383 23.951,77.458 RAC1.1@24.526,77.458 ; RAC1.1@24.272,77.458 27.738,77.458 Q10.5@27.813,77.533 Q10.6@29.083,77.533 Q10.7@30.353,77.533 Q10.8@31.623,77.533
  Bottom Layer w0.2: C67.1@31.053,76.581 C63.2@33.082,76.581 32.893,76.77 v1(32.893,77.597)
NetC64_2: C64.2 R66.1 | length 4.7
  Bottom Layer w1: R66.1@18.034,99.568 18.884,99.568 21.045,97.407 21.744,97.407 C64.2@21.844,97.307
NetC65_1: C65.1 R65.2 U16.24 | length 9
  Top Layer w0.5: 33.796,71.616 33.796,73.967 35.628,75.799 35.791,75.799 C65.1@35.941,75.949 ; C65.1@35.56,75.949 R65.2@35.56,79.68
NetC66_1: C66.1 Q11.4 R68.2 R69.1 | length 35.7
  Top Layer w0.2: Q11.4@13.335,82.233 13.335,83.566 14.097,84.328 v1(15.113,84.328) v1(25.146,84.328)
  Bottom Layer w0.2: C66.1@14.413,78.994 R68.2@14.413,80.956 14.413,83.628 v1(15.113,84.328) ; v1(25.146,84.328) 28.865,84.328 36.734,76.459 36.734,75.168 37.034,74.868 R69.1@37.084,74.868
NetC68_1: C68.1 L5.1 Q12.1 Q12.2 Q12.3 Q13.5 Q13.6 Q13.7 Q13.8 U16.20 | length 54.7
  Top Layer w0.2: Q13.6@14.542,64.77 15.915,64.77 16.296,64.389 v1(16.383,64.389) ; v1(24.003,60.579) 26.198,60.579 27.032,61.413 27.032,62.501 28.866,64.335 35.633,64.335 36.884,65.586 36.884,68.018 v1(36.195,68.707) 35.421,69.481 U16.20@33.796,69.481
  Top Layer w1: Q12.3@18.351,64.643 Q12.2@18.351,65.913
  Top Layer w2: Q13.5@14.542,63.5 Q13.6@14.542,64.77 Q13.7@14.542,66.04 14.542,66.675 15.05,67.183 18.287,67.183 18.287,67.512 18.669,67.894 18.669,72.469 L5.1@18.494,72.644 ; Q12.2@18.351,65.913 Q12.1@18.351,67.183
  Bottom Layer w0.2: v1(16.383,64.389) 16.383,61.976 17.272,61.087 19.877,61.087 20.385,60.579 v1(24.003,60.579) ; v1(36.195,68.707) 36.638,69.15 C68.1@41.021,69.15
NetC68_2: C68.2 D26.2 U16.22 | length 7.5
  Top Layer w0.2: U16.22@33.796,70.481 36.493,70.481 36.878,70.866 v1(36.957,70.866)
  Bottom Layer w0.2: v1(36.957,70.866) 38.022,70.866 D26.2@38.354,70.534 ; D26.2@38.454,70.534 38.532,70.612 40.959,70.612 C68.2@41.021,70.55
NetC69_1: C69.1 C70.1 C72.1 C75.1 P7.1 Q11.5 Q11.6 Q11.7 Q11.8 R79.2 R80.2 RSR1.2 U16.13 | length 132.1
  Top Layer w0.2: 8.636,76.684 9.789,75.531 14.646,75.531 15.875,74.302 v1(15.875,69.088) ; RSR1.2@9.398,77.533 RSR1.2@9.398,77.684 ; Q11.7@15.875,77.533 15.875,74.868 16.637,74.106 v1(16.637,70.104) ; v1(29.591,66.167) 30.246,66.822 U16.13@30.246,67.931
  Top Layer w2: P7.1@6.223,100.29 8.041,100.29 9.398,98.933 9.398,92.075 8.659,91.336 RSR1.2@8.659,77.684 ; RSR1.2@9.398,77.533 Q11.5@13.335,77.533 Q11.6@14.605,77.533 Q11.7@15.875,77.533
  Bottom Layer w0.2: v1(15.875,69.088) 20.393,64.57 27.493,64.57 27.499,64.576 28.972,64.576 29.272,64.876 C72.1@29.272,64.926 ; v1(16.637,70.104) 18.262,68.479 20.963,68.479 21.263,68.179 R79.2@21.263,68.129 21.271,68.121 C75.1@21.271,66.167 21.271,66.117 22.479,64.909 27.861,64.909 28.787,65.836 28.787,66.212 29.714,67.138 33.572,67.138 34.398,66.313 34.434,66.313 34.707,66.04 35.836,66.04 36.506,65.37 40.145,65.37 42.18,63.335 49.42,63.335 53,59.755 R80.2@69.252,59.755 ; C72.1@29.21,64.988 29.591,65.369 v1(29.591,66.167)
NetC71_1: C71.1 D26.1 U16.18 | length 8.9
  Top Layer w0.2: U16.18@32.746,67.931 ccw(c33.33,67.931) 33.33,67.347 35.089,67.347 v1(35.306,67.564)
  Bottom Layer w0.2: v1(35.306,67.564) 37.924,67.564 D26.1@38.354,67.134 38.403,67.183 39.78,67.183 39.845,67.248 41.018,67.248 C71.1@41.021,67.245
NetC72_2: C72.2 C74.2 L5.2 RSR1.1 U16.14 | length 47.4
  Top Layer w0.2: L5.2@11.419,74.002 12.494,72.927 L5.2@12.494,72.644 11.934,72.084 9.259,72.084 RSR1.1@8.659,72.684 8.659,74.94 8.776,75.057 14.478,75.057 15.113,74.422 v1(15.113,69.723) ; v1(30.607,66.148) 30.607,66.167 30.644,66.204 30.644,66.578 30.74,66.674 30.74,67.925 U16.14@30.746,67.931
  Top Layer w2: RSR1.1@8.659,72.684 8.679,72.664 9.779,72.664 12.474,72.664 L5.2@12.494,72.644
  Bottom Layer w0.2: v1(15.113,69.723) 15.113,68.925 19.922,64.116 29.912,64.116 C72.2@30.672,64.876 ; v1(30.607,66.148) 30.607,64.991 C72.2@30.672,64.926 C72.2@30.672,64.876 ; C74.2@30.672,62.992 C72.2@30.672,64.876
NetC75_2: C75.2 R79.1 R84.2 U16.12 | length 13
  Top Layer w0.2: v1(27.813,65.786) 28.829,66.802 28.829,68.834 28.961,68.966 29.481,68.966 U16.12@29.496,68.981
  Bottom Layer w0.2: R79.1@22.663,68.129 22.663,66.175 22.855,65.983 24.393,65.983 R84.2@24.577,66.167 24.577,66.117 25.331,65.363 27.387,65.363 27.81,65.786 v1(27.813,65.786) ; R84.2@24.633,66.107 25.354,65.386
NetC76_1: C76.1 U16.7 | length 4.9
  Top Layer w0.2: v1(27.305,71.755) 27.559,71.755 27.833,71.481 U16.7@29.196,71.481
  Bottom Layer w0.2: C76.1@25.084,70.231 25.084,70.281 26.558,71.755 v1(27.305,71.755)
NetC77_1: C77.1 R86.2 U16.6 | length 7.7
  Top Layer w0.2: v1(27.051,73.406) 27.926,72.531 30.232,72.531 U16.6@30.246,72.531
  Bottom Layer w0.2: C77.1@24.833,76.656 25.133,76.356 25.133,75.82 26.227,74.726 26.227,74.626 26.974,73.879 26.974,73.483 v1(27.051,73.406)